# EAGLE board GPS_radiologger_v24_L70_CMWX_MAX_v17 (EAGLE 9.6.2)
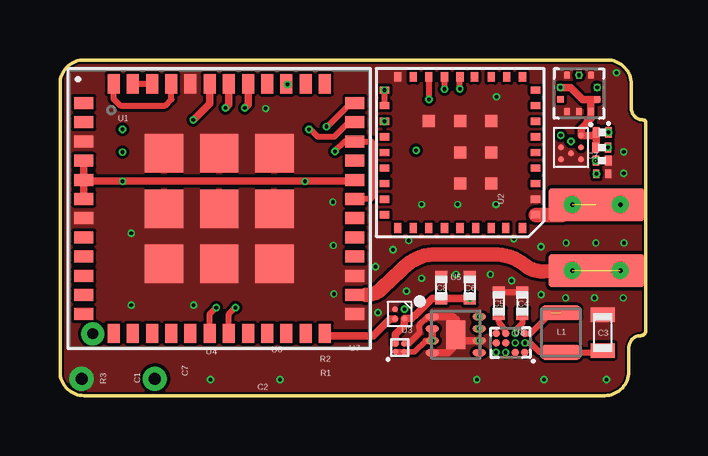
[diagram p0: board, top side]
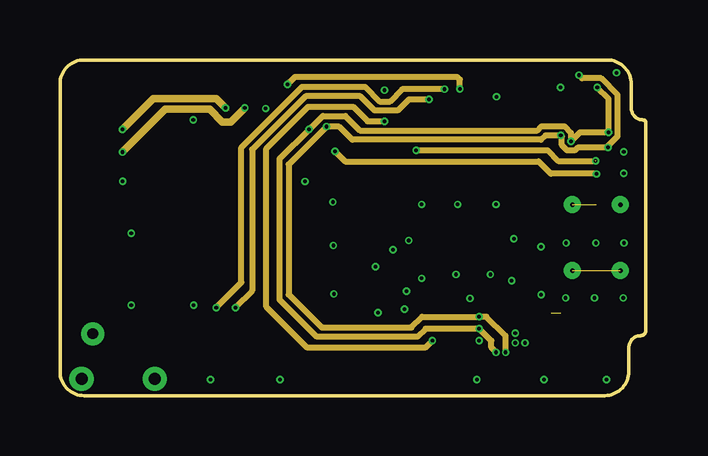
[diagram p1: board, inner layer Route2]
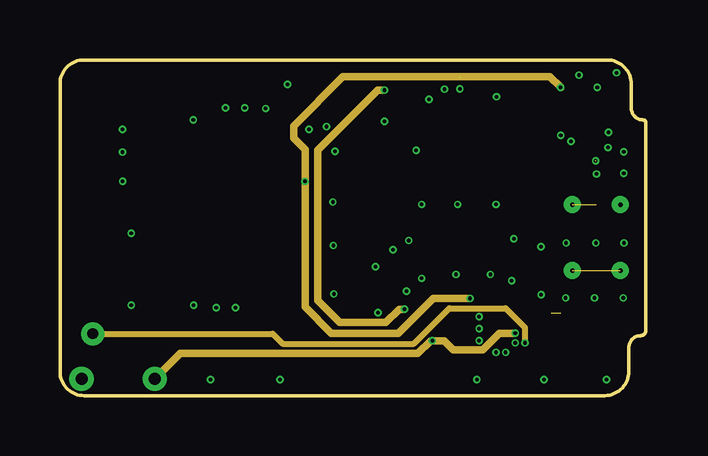
[diagram p2: board, inner layer Route15]
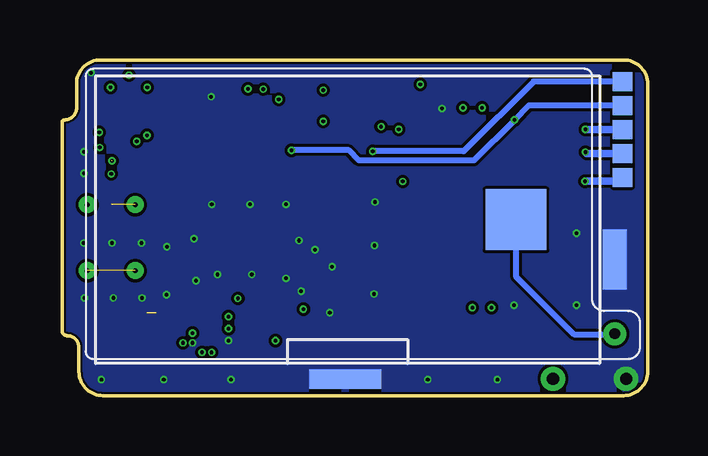
[diagram p3: board, bottom side, seen from below]

Size 24.4 x 14 mm. Coordinates in mm from the lower left corner, seen from the top.
Outline: 1,14 22.8,14 arc-90 23.8,13 23.8,12 arc90 24.3,11.5 arc-90 24.4,11.4 24.4,2.7 arc-90 24.2,2.5 arc90 23.7,2 23.7,1 arc-90 22.7,0 1,0 arc-90 0,1 0,13 arc-90 1,14
Copper layers (1*2+15*16): Top 0.035mm / dielectric 0.08mm / Route2 0.035mm / dielectric 0.08mm / Route15 0.035mm / dielectric 0.11mm / Bottom 0.035mm
Design rules "default *": minimum track width 5mil, minimum drill 0.15mm, track to track 5mil, track to pad 3mil, pad to pad 3mil, via to via 3mil, smd to smd 3mil, copper to edge 3mil, drill to drill 3mil, minimum pad ring 10mil, minimum via ring 3mil, stop-mask expansion 0mil, vias tented up to drill 20mil, thermal gap 0mil
Net classes: 0 default: width 0.254 mm; 1 power: width 0.305 mm; 2 antenna: width 0.61 mm, clearance 0.305 mm; 3 battery: width 0.254 mm; 4 diff_pair: width 0.178 mm, clearance 0.152 mm

## Footprints (pad centres in the part's own frame; a part is rotated, then mirrored left to right if it is on the bottom)
ICARUS_NITINOL_ANTENNA_SHORT = smd 4 x 1.4: 1 0,0 | drill 0.2: 2 -1,0; 3 1,0
0603-TIGHT = smd 0.6 x 1: P$1 -0.75,0; P$2 0.75,0
0402-TIGHTER = smd 0.5 x 0.5: P$1 -0.45,0; P$2 0.45,0
C0201 = smd 0.25 x 0.35: 1 -0.25,0; 2 0.25,0
1X01_SMALL = drill 0.508: P$1 0,0
INDC2016X120L = smd 0.6 x 1.612: 1 -0.825,0; 2 0.825,0
R0201 = smd 0.28 x 0.43: 1 -0.255,0; 2 0.255,0
ICARUS_FULL_FOOTPRINT = drill 0.45: P$1 5,11.5 | smd 2.5 x 1: P$2 1.9,11.5
TP08SQ = smd 0.8 x 0.8: TP 0,0
TYPEABZ = smd 0.8 x 0.5: P$1 -5.65,4.4; P$2 -5.65,3.6; P$3 -5.65,2.8; P$4 -5.65,2; P$5 -5.65,1.2; P$6 -5.65,0.4; P$7 -5.65,-0.4; P$8 -5.65,-1.2; P$9 -5.65,-2; P$10 -5.65,-2.8; P$11 -5.65,-3.6; P$12 -5.65,-4.4; P$25 5.65,-4.4; P$26 5.65,-3.6; P$27 5.65,-2.8; P$28 5.65,-2; P$29 5.65,-1.2; P$30 5.65,-0.4; P$31 5.65,0.4; P$32 5.65,1.2; P$33 5.65,2; P$34 5.65,2.8; P$35 5.65,3.6; P$36 5.65,4.4 | smd 0.5 x 0.8: P$13 -4.4,-5.2; P$14 -3.6,-5.2; P$15 -2.8,-5.2; P$16 -2,-5.2; P$17 -1.2,-5.2; P$18 -0.4,-5.2; P$19 0.4,-5.2; P$20 1.2,-5.2; P$21 2,-5.2; P$22 2.8,-5.2; P$23 3.6,-5.2; P$24 4.4,-5.2; P$37 4.4,5.2; P$38 3.6,5.2; P$39 2.8,5.2; P$40 2,5.2; P$41 1.2,5.2; P$42 0.4,5.2; P$43 -0.4,5.2; P$44 -1.2,5.2; P$45 -2,5.2; P$46 -2.8,5.2; P$47 -3.6,5.2; P$48 -4.4,5.2 | smd 1.6 x 1.6: P$49 -2.3,2.3; P$50 0,2.3; P$51 2.3,2.3; P$52 -2.3,0; P$53 0,0; P$54 2.3,0; P$55 -2.3,-2.3; P$56 0,-2.3; P$57 2.3,-2.3
LG77L = smd 0.4 x 0.3 bottom: P$1 3.15,2.6; P$2 3.15,1.95; P$3 3.15,1.3; P$4 3.15,0.65; P$5 3.15,0; P$6 3.15,-0.65; P$7 3.15,-1.3; P$8 3.15,-1.95; P$9 3.15,-2.6; P$19 -3.15,-2.6; P$20 -3.15,-1.95; P$21 -3.15,-1.3; P$22 -3.15,-0.65; P$23 -3.15,0; P$24 -3.15,0.65; P$25 -3.15,1.3; P$26 -3.15,1.95; P$27 -3.15,2.6 | smd 0.3 x 0.4 bottom: P$10 2.6,-3.15; P$11 1.95,-3.15; P$12 1.3,-3.15; P$13 0.6,-3.15; P$14 0,-3.15; P$15 -0.65,-3.15; P$16 -1.3,-3.15; P$17 -1.95,-3.15; P$18 -2.6,-3.15; P$28 -2.6,3.15; P$29 -1.95,3.15; P$30 -1.3,3.15; P$31 -0.65,3.15; P$32 0,3.15; P$33 0.65,3.15; P$34 1.3,3.15; P$35 1.9,3.15; P$36 2.6,3.15 | smd 0.5 x 0.5 bottom: P$37 0,0; P$38 0,1.3; P$39 1.3,1.3; P$40 1.3,0; P$41 1.3,-1.3; P$42 0,-1.3; P$43 -1.3,-1.3
PQFN50P200X200X80-10N = smd 0.275 x 0.25: 1 -0.765,0.25; 2 -0.765,-0.25; 6 0.765,-0.25; 7 0.765,0.25 | smd 0.25 x 0.275: 3 -0.5,-0.765; 4 0,-0.765; 5 0.5,-0.765; 8 0.5,0.765; 9 0,0.765 | smd 0.255 x 0.275: 10 -0.5,0.765
BGA4N35P2X2_70X70X40N = smd 0.26 x 0.26: A1 -0.175,0.175; A2 0.175,0.175; B1 -0.175,-0.175; B2 0.175,-0.175
SON50P200X200X75-9T80X120L = smd 0.562 x 0.282: 1 -0.975,0.75; 2 -0.975,0.25; 3 -0.975,-0.25; 4 -0.975,-0.75; 5 0.975,-0.75; 6 0.975,-0.25; 7 0.975,0.25; 8 0.975,0.75 | smd 0.8 x 1.2: 9 0,0
YFP0004-DSBGA = smd 0.25 x 0.25: A1 0.2,-0.2; A2 -0.2,-0.2; B1 0.2,0.2; B2 -0.2,0.2
WLCSP8 = smd 0.24 x 0.24: P$1 -0.5,0.425; P$2 0,0.425; P$3 0.5,0.425; P$4 -0.25,0; P$5 0.25,0; P$6 -0.5,-0.425; P$7 0,-0.425; P$8 0.5,-0.425
BGA12N40P4X3_123X163X64N = smd 0.32 x 0.32: A1 -0.6,0.4; A2 -0.2,0.4; A3 0.2,0.4; A4 0.6,0.4; B1 -0.6,0; B2 -0.2,0; B3 0.2,0; B4 0.6,0; C1 -0.6,-0.4; C2 -0.2,-0.4; C3 0.2,-0.4; C4 0.6,-0.4
ICARUS_FULL = smd 2.54 x 2.54: P$1 0,-7.02 | smd 0.8 x 3: P$2 -6.65,0.09

## Placement (x,y rotation side)
ANT_GPS  NITINOL_ANTENNA_SHORT  [ICARUS_NITINOL_ANTENNA_SHORT]  22.35,7.96 180 top
ANT_LORA  NITINOL_ANTENNA_SHORT  [ICARUS_NITINOL_ANTENNA_SHORT]  22.35,5.21 0 top
C3  10UF  [0603-TIGHT]  22.61,2.63 270 top
C4  1.0UF  [0402-TIGHTER]  19.27,3.85 270 top
C5  1.0UF  [0402-TIGHTER]  18.29,3.85 270 top
C6  0.1 uF  [0402-TIGHTER]  17.08,4.5 270 top
C7  [C0201]  22.6,9.24 0 top
C8  1 uF  [0402-TIGHTER]  15.88,4.5 90 top
J5  [1X01_SMALL]  0.9,0.7 0 top
J8  [1X01_SMALL]  3.95,0.7 180 top
L1  4.7 uH  [INDC2016X120L]  20.87,2.63 90 top
R1  4.7 k  [R0201]  22.58,10.35 180 top
R2  4.7 k  [R0201]  22.6,10.98 180 top
R3  10k  [R0201]  22.59,9.8 180 top
SOL  ICARUS_V4_FOOTPRINT  [ICARUS_FULL_FOOTPRINT]  12.87,7.58 270 bottom
TP1  PTR1TP08SQ  [TP08SQ]  1.05,9.1 0 bottom
TP2  PTR1TP08SQ  [TP08SQ]  1.05,11.1 0 bottom
TP3  PTR1TP08SQ  [TP08SQ]  1.05,10.1 0 bottom
TP4  PTR1TP08SQ  [TP08SQ]  1.05,12.1 0 bottom
TP5  PTR1TP08SQ  [TP08SQ]  1.05,13.1 0 bottom
U1  TYPEABZ  [TYPEABZ]  6.64,7.8 0 top
U2  LG77L  [LG77L]  16.67,10.14 180 bottom
U3  BMP388  [PQFN50P200X200X80-10N]  21.62,12.6 180 top
U4  TPS7A03-DSBGA  [BGA4N35P2X2_70X70X40N]  14.15,2 90 top
U5  MAX17048G+  [SON50P200X200X75-9T80X120L]  16.49,2.54 0 top
U6  TPS22907YZT  [YFP0004-DSBGA]  14.15,3.4 90 top
U7  CAT24_WLCSP8  [WLCSP8]  21.29,10.35 270 top
U8  MAX20361  [BGA12N40P4X3_123X163X64N]  18.77,2.2 180 top
U$3  ICARUS_FULL  [ICARUS_FULL]  12.51,7.34 90 bottom

## Library data of the parts
ANT_GPS ANT_LORA = Antenna_mounts
C3-C6 C8 = SparkFun-Capacitors
C7 = rcl; SPICEPREFIX: C
J5 J8 = SparkFun-Connectors
L1 U5 U7 = Ryan_custom
R1-R3 = rcl; SPICEPREFIX: R
SOL U$3 = TrisolX_Solar_Cells
TP1-TP5 = testpad
U1 = Kris
U2 = Quectel
U3 = BMP388; AVAILABILITY: Unavailable; DESCRIPTION: Pressure Sensor 4.35PSI ~ 18.13PSI (30kPa ~ 125kPa) Absolute 10-WFLGA; MF: Bosch Sensortec; MP: BMP388; PACKAGE: WFLGA-10 Bosch Tools; PRICE: None
U4 U8 = Ryan_Custom_Fusion
U6 = TPS22916

## Nets
BAT [battery]: C4.P$2 J8.P$1 U2.P$21 U4.A1 U4.B1 U5.2 U5.3 U8.C2
BOOT: R3.2 TP4.TP U1.P$43
GND: C3.P$1 C4.P$1 C5.P$1 C6.P$1 C7.2 C8.P$2 J5.P$1 R3.1 SOL.P$2 U1.P$3 U1.P$7 U1.P$25 U1.P$27 U1.P$44 U1.P$49 U1.P$50 U1.P$51 U1.P$52 U1.P$53 U1.P$54 U1.P$55 U1.P$56 U1.P$57 U2.P$2 U2.P$18 U2.P$37 U2.P$38 U2.P$39 U2.P$40 U2.P$41 U2.P$42 U2.P$43 U3.3 U3.5 U3.8 U3.9 U4.B2 U5.1 U5.4 U5.6 U5.9 U6.B1 U7.P$3 U7.P$5 U7.P$7 U7.P$8 U8.B2 U$3.P$2
GPS_ON: U1.P$24 U6.B2
GPS_PWR: U2.P$19 U2.P$20 U6.A1
GPS_RST: U1.P$39 U2.P$14
N$1: U1.P$45 U1.P$48
N$2 [antenna]: ANT_GPS.1 ANT_GPS.2 ANT_GPS.3 U2.P$1
N$3: L1.2 U8.C1
N$4: C5.P$2 U8.C3
N$11 [antenna]: ANT_LORA.1 ANT_LORA.2 ANT_LORA.3 U1.P$26
N$15 [battery]: C3.P$2 L1.1 SOL.P$1 U8.B1 U$3.P$1
POWER [power]: C6.P$2 C8.P$1 R1.2 R2.2 TP1.TP U1.P$4 U1.P$5 U1.P$6 U1.P$32 U3.1 U3.6 U3.10 U4.A2 U6.A2 U7.P$1
RST: C7.1 TP5.TP U1.P$31 U1.P$34
RX: U1.P$18 U2.P$15
SCL: R2.1 U1.P$35 U3.2 U5.7 U7.P$4 U8.A4
SDA: R1.1 U1.P$36 U3.4 U5.8 U7.P$6 U8.A3
SWDCLK: TP2.TP U1.P$42
SWDIO: TP3.TP U1.P$41
TCXO_OUT: U1.P$46 U1.P$47
TX: U1.P$19 U2.P$16

## Tracks (layer width: path | path; a pad name or v marks a point on that pad's centre or on a via)
BAT  (via drill 0.15)
  Top 0.254: U8.C2 19,2.58 19,2.74 19.27,3.01 C4.P$2 | U4.A1 U4.B1 14.78,1.83 15.23,2.29 U5.3
  Top 0.305: U5.3 U5.2
  Route2 0.254: U2.P$21 12.82,11.44 12.21,12.05 10.34,12.05 8.6,10.31 8.6,3.7 10.31,1.99 15.21,1.99 U5.3
  Route15 0.305: U8.C2 18.31,2.6 17.62,1.91 16.38,1.91 16,2.29 U5.3 15.45,2.29 14.91,1.75 5,1.75 J8.P$1
  other vias: 18.97,2.6 15.52,2.29 13.52,11.44
BOOT  (via drill 0.15)  (1 unrouted)
  Top 0.305: U1.P$43 6.24,12.19 v5.55,11.5
  Route2 0.254: v14.84,10.23 20.32,10.23 20.76,9.79 v22.32,9.79
  Bottom 0.254: TP4.TP 4.95,12.1 v5.55,11.5 7.24,9.81 12.04,9.81 12.46,10.23 v14.84,10.23
GND  (via drill 0.15)
  Top 0.254: C4.P$1 C5.P$1 | U4.B2 14.53,2.17 14.99,2.64 14.98,2.94 15.32,3.29 U5.1
  Top 0.305: U5.6 16.74,2.29 16.7,2.33 | 16.7,2.33 U5.9 16.5,3.18 16.39,3.29 U5.1 | U5.4 16.16,1.79 16.7,2.33
  other vias: 18.91,6.54 14.53,6.47 13.87,6.08 13.15,5.38 15.07,4.89 17.93,5.05 21.09,6.37 22.33,6.37 23.5,6.37 20.04,6.21 18.97,2.2 17.46,2.29 14.44,4.35 13.25,3.46 18.82,4.79 16.5,5.05 20.05,4.21 11.41,4.24 11.39,6.26 11.37,8.07 15.07,7.97 16.57,7.97 18.17,7.97 23.47,4.07 22.27,4.07 21.07,4.07 23.49,9.27 23.49,10.17 23.19,13.47 18.19,12.47 22.77,0.67 20.17,0.67 17.37,0.67 5.57,3.77 2.97,3.77 2.97,6.77 8.57,11.97 6.27,0.67 9.17,0.67
  pour Top: -0.25,-0.53 28.38,-0.53 28.3,14.68 0,14.68 -0.26,0.08
  pour Bottom: -0.35,-0.78 28.56,-0.78 28.56,14.9 -0.21,14.9 -0.35,-0.33
GPS_ON
  Top 0.305: U6.B2 13.75,3.2 13.05,2.5 11.14,2.5 U1.P$24
GPS_PWR  (via drill 0.15)
  Top 0.254: U2.P$19 U2.P$20
  Route15 0.305: U6.A1 14.13,3.6 13.58,3.05 11.65,3.05 10.73,3.97 10.73,10.23 13.24,12.74 U2.P$19
  other vias: 14.35,3.6 13.52,12.74
GPS_RST  (via drill 0.15)  (1 unrouted)
  Top 0.152: v9.48,12.98 9.46,13 U1.P$39
  Top 0.254: v16.66,12.79 U2.P$14
  Route2 0.254: v9.48,12.98 9.79,13.29 16.55,13.29 16.66,13.18 v16.66,12.79
N$1
  Top 0.254: U1.P$48 2.24,12.38 2.23,12.37 2.5,12.1 4.38,12.1 4.64,12.36 U1.P$45
N$2  (1 unrouted)
  Top 0.61: U2.P$1 20.93,7.54 ANT_GPS.3 | ANT_GPS.2 ANT_GPS.1
N$3  (1 unrouted)
  Top 0.254: U8.C1 19.62,2.6 20.47,3.46
N$4
  Top 0.254: U8.C3 18.54,2.6 18.54,2.71 18.29,3.07 C5.P$2
N$11  (2 unrouted)
  Top 0.508: U1.P$26 12.73,4.2
  Top 0.61: 12.73,4.2 arc44 13.43,4.48 14.2,5.22 arc-44 15.54,5.89 18.06,5.89 arc-39 19.37,5.44 arc39 20.13,5.18 ANT_LORA.1
N$15  (via drill 0.15)
  Top 0.254: U8.B1 19.59,2.2 19.97,1.82 L1.1 22.54,1.8 C3.P$2
  Route15 0.254: SOL.P$1 8.86,2.58 9.28,2.16 14.74,2.16 16.22,3.64 18.57,3.64 19.37,2.84 U8.B1
  Bottom 0.254: U$3.P$1 5.49,4.97 3.08,2.56 1.39,2.56 SOL.P$1
  other vias: 19.37,2.2
POWER  (via drill 0.15)
  Top 0.305: U1.P$32 12.23,8.94 v10.22,8.94 | U1.P$4 U1.P$5 | U1.P$5 U1.P$6 | U1.P$5 1.04,8.95 v2.6,8.95 v2.61,8.94 v10.22,8.94 | U3.6 21.29,12.85 21.79,12.35 22.14,12.35 | 22.14,12.35 U3.1 | 22.14,12.35 22.12,12.33 U3.10 22.12,11.55 21.71,11.14 U7.P$1 22.21,10.85 R2.2 22.34,10.37 R1.2 | U4.A2 13.97,2.54 14.35,2.92 U6.A2 14.66,3.21 14.79,3.34 14.8,3.34 15.51,4.05 C8.P$1 C6.P$2 | v10.21,8.93 v10.22,8.94
  Route15 0.305: U3.6 20.85,12.87 20.41,13.31 11.79,13.31 9.73,11.25 9.73,10.75 10.21,10.27 v10.21,8.93 10.21,3.7 11.31,2.6 14.1,2.6 15.55,4.05 C6.P$2
  Bottom 0.254: v2.6,8.95 v2.61,8.94
  Bottom 0.305: v2.6,8.95 1.2,8.95 TP1.TP
  other vias: 20.85,12.85 17.08,4.05
RST  (via drill 0.15)
  Top 0.254: v11.46,10.19 11.87,10.6 U1.P$34 12.98,10.6 12.99,10.59 12.99,8.25 12.94,8.2 U1.P$31
  Route2 0.254: v11.46,10.19 11.88,9.77 19.94,9.77 20.45,9.26 22.34,9.26 C7.1
  Bottom 0.254: TP5.TP 4.76,13.1 7.67,10.19 v11.46,10.19
  other vias: 22.35,9.24
RX  (via drill 0.15)
  Top 0.254: U1.P$18 6.24,3.4 v6.51,3.67 | U2.P$15 v16.02,12.78
  Route2 0.254: v16.02,12.78 14.26,12.78 13.75,12.27 13.32,12.27 12.71,12.88 10.09,12.88 7.56,10.35 7.56,4.72 v6.51,3.67
SCL  (via drill 0.15)
  Top 0.254: U1.P$35 12.03,11.4 11.41,10.78 10.76,10.78 10.4,11.14 10.38,11.12 v10.38,11.1
  Route2 0.254: U8.A4 17.97,2 17.97,2.29 17.61,2.64 U5.7 15.23,2.79 14.89,2.45 10.7,2.45 9.15,4 9.15,9.88 v10.38,11.1 10.47,11.19 10.49,11.19 10.95,11.66 11.89,11.66 12.49,11.06 19.89,11.06 20.06,11.23 21.02,11.23 21.29,10.96 U7.P$4 21.67,10.98 R2.1 22.85,12.38 U3.2
  other vias: 22.38,12.85 18.17,1.8 17.46,2.79 21.29,10.6 22.85,10.98
SDA  (via drill 0.15)
  Top 0.254: U1.P$36 12.11,12.2 11.13,11.22 v11.11,11.22
  Route2 0.254: U8.A3 18.57,2.49 17.77,3.29 U5.8 15.09,3.29 14.64,2.84 10.91,2.84 9.53,4.22 9.53,9.64 v11.11,11.22 11.63,11.22 12.18,10.67 20.04,10.67 20.22,10.85 U7.P$6 20.91,10.81 20.91,10.44 21.13,10.22 21.45,10.22 21.57,10.34 R1.1 22.83,10.42 23.24,10.82 23.24,12.54 22.54,13.23 21.75,13.23 U3.4
  other vias: 21.62,13.37 18.57,1.8 17.46,3.29 20.86,10.85 22.83,10.35
SWDCLK  (via drill 0.15)
  Top 0.305: U1.P$42 7.04,12.14 v6.9,12
  Route2 0.305: v6.9,12 6.52,12.38 3.88,12.38 v2.6,11.1
  Bottom 0.305: v2.6,11.1 TP2.TP
SWDIO  (via drill 0.15)
  Top 0.305: U1.P$41 7.84,12.14 v7.7,12
  Route2 0.305: v7.7,12 7.11,11.41 6.76,11.41 6.23,11.94 4.39,11.94 v2.6,10.15
  Bottom 0.305: v2.6,10.15 2.54,10.1 TP3.TP
TCXO_OUT
  Top 0.254: U1.P$46 U1.P$47
TX  (via drill 0.15)
  Top 0.254: U1.P$19 7.04,3.4 v7.31,3.67 | U2.P$16 v15.37,12.35
  Route2 0.254: v15.37,12.35 14.53,12.35 14.07,11.89 13.11,11.89 12.51,12.49 10.24,12.49 8.01,10.26 8.01,4.37 v7.31,3.67

## Text on the board
tNames: U1 | U2 | C8 | C6 | C5 | C4 | U3 | U8 | L1 | C3 | U4 | U6 | R2 | U7 | R3 | C1 | C7 | R1 | C2